# Altium PCB PCB2.PcbDoc
Units mm, origin at the board's own origin, x right, y up, seen from the top; angles counter-clockwise.
Board outline 41.66 x 60.2 mm, 2 copper layers (Top Layer, Bottom Layer); 34 components, 32 nets, 114 pads, 7 vias.
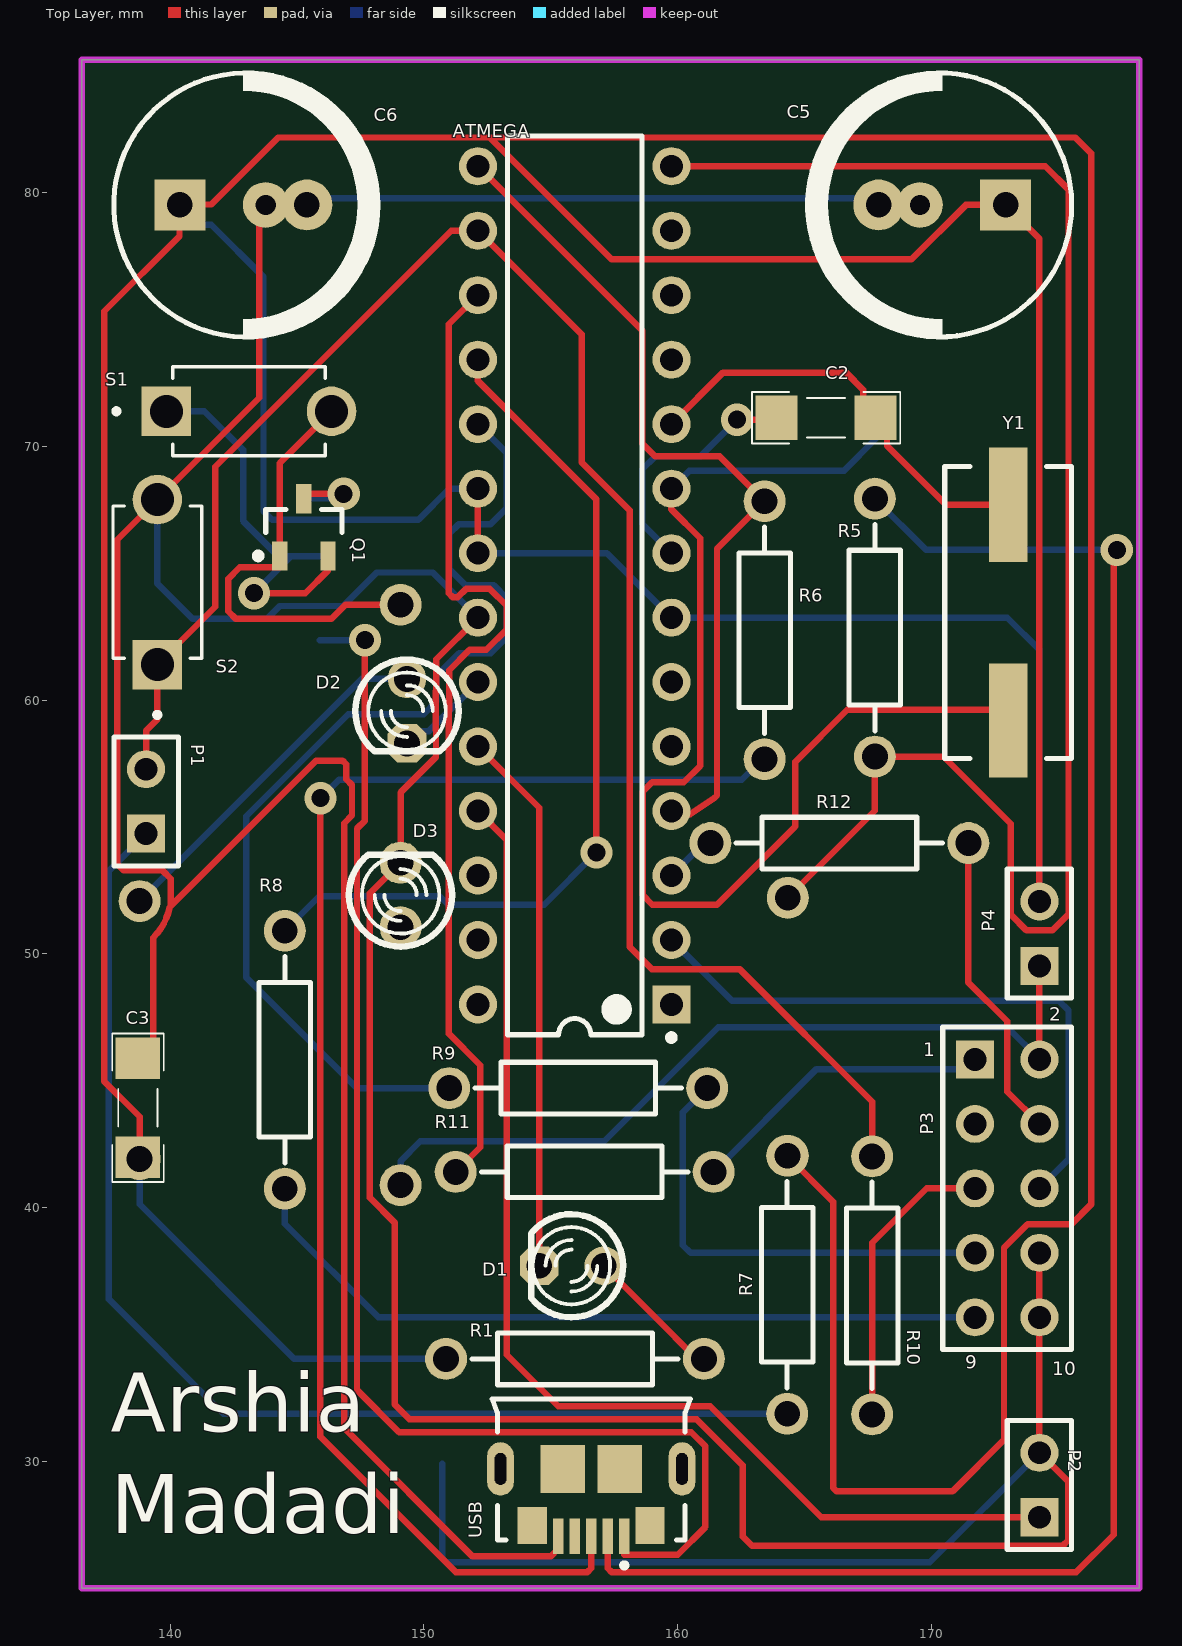
[diagram p0: Top Layer view]
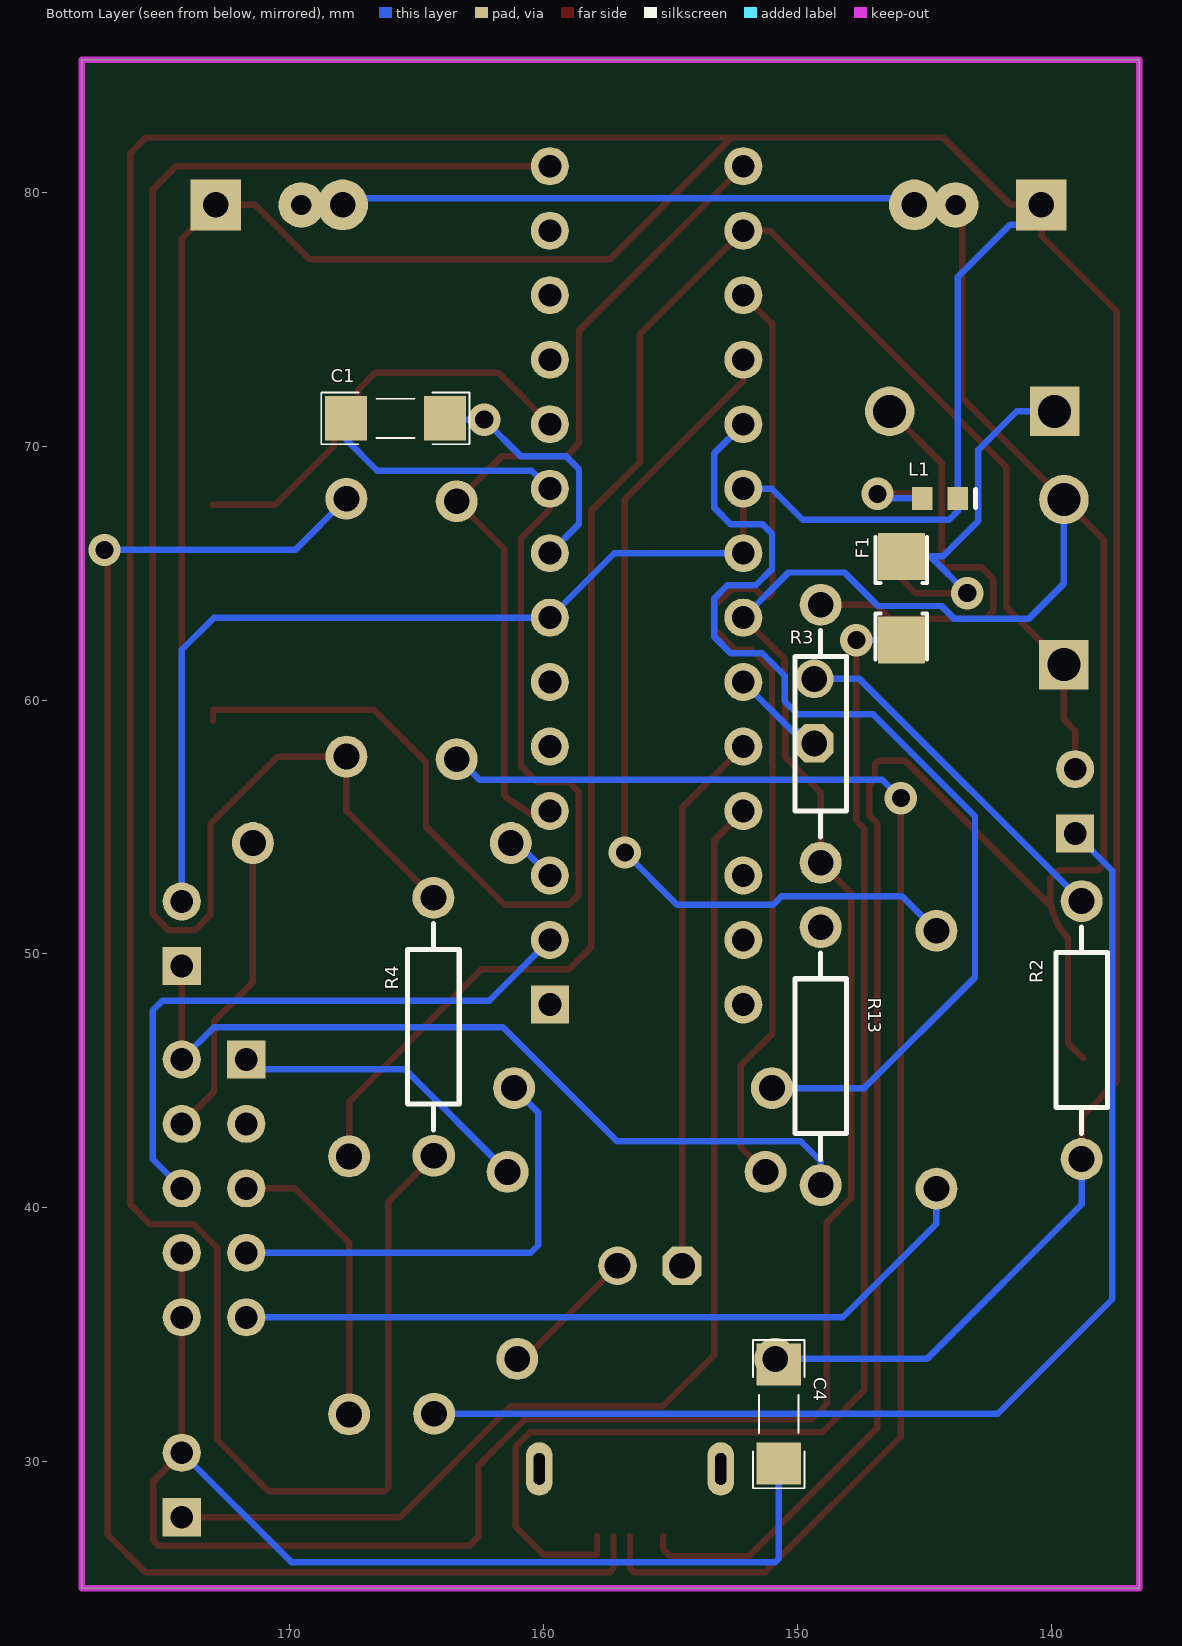
[diagram p1: Bottom Layer view, seen from below]
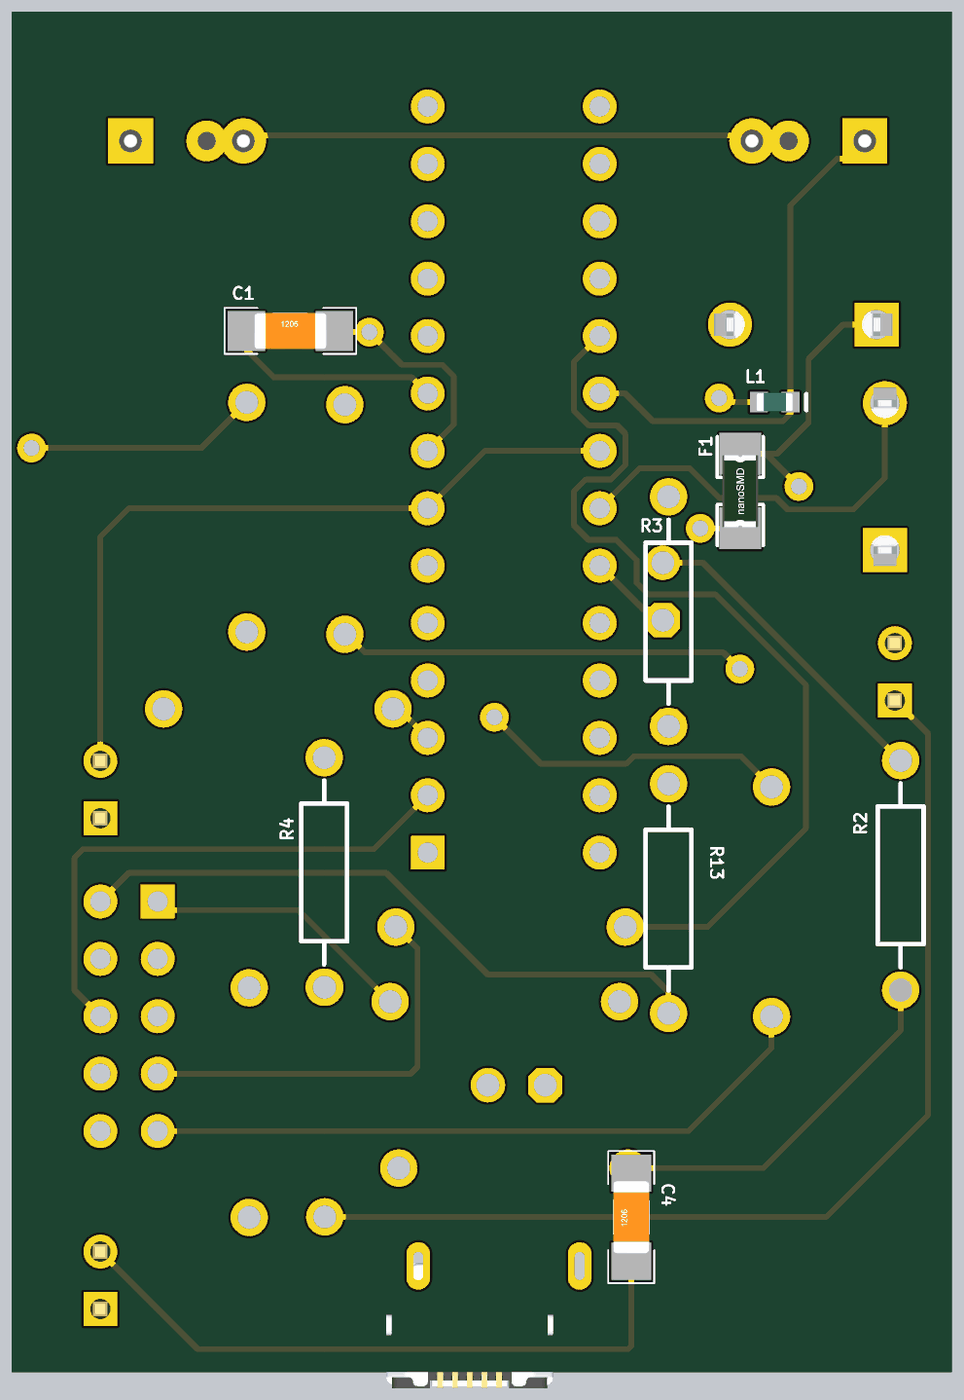
[diagram p2: 3D render of the assembled board from below, using the file's embedded part models]

## Layer stack, top to bottom
Top Solder: solder mask 0.0102, Solder Resist, Dk 3.5
Top Layer: signal copper 0.0356
Dielectric 1: dielectric 0.32, FR-4, Dk 4.8
Bottom Layer: signal copper 0.0356
Bottom Solder: solder mask 0.0102, Solder Resist, Dk 3.5

## Board outline
136.525,25.019 136.525,85.217 178.181,85.217 178.181,25.019

## Design rules (kind name [scope] priority, off if disabled: settings)
Clearance [All] p1: gap=0.254 ignorepadtopadclearanceinfootprint=FALSE except(0: Arc-Hole Track-Hole SMDPad-Hole THPad-Hole Via-Hole Fill-Hole Poly-Hole Region-Hole Text-Hole; 0.1: SMDPad-SMDPad)
PolygonConnect [All] p1: connectstyle=Relief reliefconductorwidth=0.254 reliefentries=4 polygonreliefangle="90 Angle" airgapwidth=0.254
RoutingVias [All] p1: holewidth=0.711 width=1.27 viastyle="Through Hole" minholewidth=0.711 minwidth=1.27 maxholewidth=0.711 maxwidth=1.27
SolderMaskExpansion [All] p1: expansion=0.102 istentingtop=FALSE
Width [All] p1: maxlimit=0.254 minlimit=0.254 preferedwidth=0.254
30 further rules are at their usual default settings.

## Components (designator, comment, footprint, x,y, rotation, side; value= is the part's Value field where it differs from the comment)
ATMEGA "ATmega8A-PU" 28P3 155.937,64.516 r180 top
C1 "22pF" CAPC4817X12N 165.827,71.093 r180 bottom
C2 "22pF" CAPC4817X12N 165.843,71.12 r180 top
C3 "100nF" CAPC4817X12N 138.736,43.942 r270 top
C4 "100nF" CAPC4817X12N 150.73,31.877 r90 bottom
C5 "10uF" "Cap electrolitic radial 10x20-5" 170.41,79.502 r180 top
C6 "10uF" "Cap electrolitic radial 10x20-5" 142.889,79.502 r0 top
D1 "LED" My_LED3MM 155.81,37.719 r180 top
D2 "LED" My_LED3MM 149.333,59.563 r270 top
D3 "LED" My_LED3MM 149.079,52.324 r90 top
F1 "F=1.0 A" "1206 FUSE" 145.904,64.008 r90 bottom
L1 "Inductor" INDC1608L 144.38,67.945 r0 bottom value=10uH
P1 "UPDATE" HDR1X2 139.055,54.737 r90 top
P2 "CLK" HDR1X2 174.244,27.813 r90 top
P3 "SW 1" HDR2X5 171.704,45.847 r270 top
P4 "VCC" HDR1X2 174.244,49.53 r90 top
Q1 "BC807" SOT23_BEC_N 145.269,66.802 r90 top
R1 "1k" My_axial-0.4 155.937,34.036 r180 top value=270
R2 "1k" My_axial-0.4 138.788,46.99 r270 bottom value=270
R3 "1k" My_axial-0.4 149.092,58.687 r90 bottom value=4k
R4 "1k" My_axial-0.4 164.319,47.117 r270 bottom value=2k
R5 "1k" My_axial-0.4 167.748,62.865 r90 top value=100
R6 "1k" My_axial-0.4 163.43,62.738 r270 top value=100
R7 "10k" My_axial-0.4 164.319,36.957 r270 top
R8 "1k" My_axial-0.4 144.507,45.847 r90 top value=270
R9 "1k" My_axial-0.4 156.064,44.704 r180 top value=270
R10 "1k" My_axial-0.4 167.64,36.957 r90 top value=270
R11 "1k" My_axial-0.4 156.318,41.402 r180 top value=270
R12 "1k" My_axial-0.4 166.351,54.356 r180 top value=270
R13 "1k" My_axial-0.4 149.066,45.961 r270 bottom value=270
S1 "Disconnect" SW_TL1107BF130WQ 143.11,71.374 r0 top
S2 "Reset Taget" SW_TL1107BF130WQ 139.499,64.643 r90 top
USB "USB3075-30-A" GCT_USB3075-30-A 157.89,27.068 r180 top
Y1 "12 MHz" "Crystal SMD" 173.014,63.441 r270 top

## Footprints (in the part's own frame and the unit in brackets; to place one, negate y for a bottom-side part, rotate by r counter-clockwise, add the part's x,y. Pads: shape width x height; smd on the part's side, far side on the other; paste and mask are expansions set on the pad)
28P3 [mm] "DIP, 28-Leads, Row Spacing 7.62mm, Pitch 2.54mm, Body 34.67x7.3mm"
  rect 1.5x1.5 hole 0.9: 1(-3.81,16.51)
  round 1.5 hole 0.9: 2(-3.81,13.97) 3(-3.81,11.43) 4(-3.81,8.89) 5(-3.81,6.35) 6(-3.81,3.81) 7(-3.81,1.27) 8(-3.81,-1.27) 9(-3.81,-3.81) 10(-3.81,-6.35) 11(-3.81,-8.89) 12(-3.81,-11.43) 13(-3.81,-13.97) 14(-3.81,-16.51) 15(3.81,-16.51) 16(3.81,-13.97) 17(3.81,-11.43) 18(3.81,-8.89) 19(3.81,-6.35) 20(3.81,-3.81) 21(3.81,-1.27) 22(3.81,1.27) 23(3.81,3.81) 24(3.81,6.35) 25(3.81,8.89) 26(3.81,11.43) 27(3.81,13.97) 28(3.81,16.51)
  silkscreen extent -3.94,-17.7 2.65,17.93, body extent -3.6,-17.65 3.6,17.65, height 4.58
"1206 FUSE" [mm] "Fast Acting Smd 1206 non-Resettable Fuse Chip For Pcb Board-Design:Abbas Basereh"
  rect 1.85x1.85 smd: 1(-1.65,0) 2(1.65,0)
  silkscreen extent -2.41,-1.02 2.41,1.02, body extent -1.6,-0.8 1.6,0.8, height 1
"Cap electrolitic radial 10x20-5" [mm] "Cap electrolitic radial 10x20-5-Design:Abbas Basereh"
  rect 2x2 hole 1: 1(-2.5,0)
  round 1.8 hole 0.8: 2(0.875,0)
  round 2 hole 1: 2(2.5,0)
  silkscreen extent -5.1,-5.2 5.3,5.2, body extent -5,-5 5,5, height 20
CAPC4817X12N [mm] "Chip Capacitor, 2-Leads, Body 4/80x1/70mm, IPC Medium Density-Design:Abbas Basereh"
  rect 1.65x1.75 smd: 1(-1.95,0) 2(1.95,0)
  silkscreen extent -2.92,-1.02 2.92,1.02, body extent -1.6,-0.8 1.6,0.8, height 1
"Crystal SMD" [mm] "DESIGNER ABBAS BASEREH"
  rect 4.5x1.5 smd: 1(-4.25,0) 2(4.25,0)
  silkscreen extent -5.75,-2.5 5.75,2.5, body extent -6.21,-2.25 6.09,2.25, height 5.18
GCT_USB3075-30-A [mm]
  rect 0.4x1.4 smd: 1(0,0) 2(0.65,0) 3(1.3,0) 4(1.95,0) 5(2.6,0)
  rect 1.15x1.45 smd paste+0: S1(-1.02,-0.42)
  rect 1.15x1.45 smd: S2(3.62,-0.42)
  rect 1.75x1.9 smd: S3(0.175,-2.65) S4(2.425,-2.65)
  oval 1.05x2.1 hole 0.45 slot 1.25 at 90 deg: S5(-2.275,-2.65) S6(4.875,-2.65)
  silkscreen extent -2.6,-5.4 5.2,1.25, body extent -3.9,-2.78 3.9,2.78, height 2.7
HDR1X2 [mm] "Connector; Header; 2 Position"
  rect 1.5x1.5 hole 0.9: 1(0,0)
  round 1.5 hole 0.9: 2(2.54,0)
  silkscreen extent -1.27,-1.27 3.81,1.27, body extent -1.27,-1.28 3.81,1.26, height 8.79
HDR2X5 [mm] "Connector; Header; 5x2 Position"
  rect 1.5x1.5 hole 0.9: 1(0,0)
  round 1.5 hole 0.9: 2(0,2.54) 3(2.54,0) 4(2.54,2.54) 5(5.08,0) 6(5.08,2.54) 7(7.62,0) 8(7.62,2.54) 9(10.16,0) 10(10.16,2.54)
  silkscreen extent -1.27,-1.27 11.43,3.81
INDC1608L [mm] "Chip Inductor, Body 1.6x0.8mm, IPC High Density"
  rect 0.8x0.9 smd: 1(-0.7,0) 2(0.7,0)
  silkscreen extent -1.4,-0.35 -1.4,0.35, body extent -0.8,-0.4 0.8,0.4, height 0.95
My_axial-0.4 [mil]
  round 65 hole 40: 1(-200.5,-0.5) 2(199.5,-0.5)
  silkscreen extent -160,-41 160,40
My_LED3MM [mil]
  round 60 hole 40: A(-50,0)
  oct 60x60 hole 40: K(50,0)
  silkscreen extent -80,-80 62,80
SOT23_BEC_N [mm] "SOT23, 3-Leads, Body 2.9x1.3mm, Pitch 0.95mm, Lead Span 2.4mm, IPC Medium Density"
  rect 1.15x0.6 smd: 1(-1.125,0.95) 2(-1.125,-0.95) 3(1.125,0)
  silkscreen extent -1.25,-1.5 0.7,1.92, body extent -1.23,-1.45 1.07,1.45, height 1
SW_TL1107BF130WQ [mm]
  rect 1.95x1.95 / inner round 1.95 / far side rect 1.95x1.95 hole 1.3: 1(-3.25,0)
  round 1.95 hole 1.3: 2(3.25,0)
  silkscreen extent -5.32,-1.75 3,1.75, body extent -3.95,-1.75 3.95,1.75, height 5

## Part data
ATMEGA: "8-bit AVR Microcontroller, 8KB Flash, 512 Bytes EEPROM, 1KB SRAM, 28-pin PDIP, Industrial Grade (-40°C to 85°C)", Supplier Part Number 1=ATMEGA8A-PU-ND, ComponentLink1Description="Manufacturer Link", ComponentLink1URL=http://www.atmel.com/products/avr/default.asp?, ComponentLink2Description="ATmega8A Datasheet", ComponentLink2URL=http://www.atmel.com/dyn/resources/prod_documents/doc8159.pdf, ComponentLink3Description="ATmega8A Summary", ComponentLink3URL=http://www.atmel.com/dyn/resources/prod_documents/8159S.pdf, ComponentLink4Description="Atmel.com Home", ComponentLink4URL=http://www.atmel.com, DatasheetVersion="revC, Jul-2009", PackageDescription="28-lead (0.300\"/7.62mm Wide) Plastic Dual Inline Package (PDIP)", PackageReference=28P3, PackageVersion="revB, Sep-2001", Published=1-Apr-2010, Publisher="Altium Limited", Supplier 1=Digi-Key, Supplier 2=Farnell, Supplier 3=Mouser, Supplier Part Number 2=1748534, Supplier Part Number 3=556-ATMEGA8A-PU
C1 C2 C3 C4: library part "CAP SMD 1206", "CAP 1206", Data=16-12-2016, Desc.="CAP SMD 1206", Designer="Abbas Basereh"
C5 C6: library part "Cap ELECTROLITIC TOTAL SIZE", "Cap electrolitic radial", Data=16-12-2016, Designer="Abbas Basereh"
D1 D2 D3: "Typical INFRARED GaAs LED", LatestRevisionDate=08-Jul-2005, LatestRevisionNote="Mech Layer 1 removed.", Published=8-Jun-2000, Publisher="Altium Limited"
F1: library part "Fuse SMD1206", "SMD Fuses 1206", Data=16-12-2016, Desc.="SMD Fuses 1206", Designer="Abbas Basereh"
P1 P2 P4: library part "Header 2", "Header, 2-Pin", LatestRevisionDate=17-Jul-2002, LatestRevisionNote="Re-released for DXP Platform.", Publisher="Altium Limited"
P3: library part "Header 5X2", "Header, 5-Pin, Dual row", LatestRevisionDate=17-Jul-2002, LatestRevisionNote="Re-released for DXP Platform.", Publisher="Altium Limited"
Q1: "PNP General-purpose Transistor", LatestRevisionDate=29-May-2009, LatestRevisionNote="IPC-7351 Footprint Added.", PackageDescription="3-Pin SOT-23 Package 0.95 mm Pitch, 2.4 mm Lead Span", PackageReference=SOT-23B, PackageVersion=Aug-1999, Published=8-Jun-2000, Publisher="Altium Limited"
R1 R2 R3 R4 R5 R6 R7 R8 R9 R10 R11 R12 R13: library part Res, "resistor 1/4 wat"
S1 S2: library part TL1107BF130WQ, "SWITCH TACTILE SPST-NO 0.05A 12V", Package=None, Availability="In Stock", Check_prices=https://www.snapeda.com/parts/TL1107BF130WQ/E-Switch/view-part/?ref=eda, MF=E-Switch, MP=TL1107BF130WQ, Price=None, Purchase-URL=https://pricing.snapeda.com/search/part/TL1107BF130WQ/?ref=eda, SnapEDA_Link=https://www.snapeda.com/parts/TL1107BF130WQ/E-Switch/view-part/?ref=snap
USB: "USB - micro B USB 2.0 Receptacle Connector 5 Position Surface Mount, Right Angle; Through Hole, 2.35mm profile, 5 Pins, Horizontal, Bottom mount", Package=None, Availability="In Stock", Check_prices=https://www.snapeda.com/parts/USB3075-30-A/Global+Connector+Technology/view-part/?ref=eda, MF="Global Connector Technology", MP=USB3075-30-A, Price=None, SnapEDA_Link=https://www.snapeda.com/parts/USB3075-30-A/Global+Connector+Technology/view-part/?ref=snap
Y1: library part XTAL, "XTAL Crystal", ComponentLink1Description=Datasheet, ComponentLink2Description=Reference, Design Date=2017-1-3, Designer="ABBAS BASEREH", Mounting Technology="Surface Mount\Through-Hole", Status=Unreleased
L1: Code_IEC=1005, Code_JEITA=0402, LatestRevisionDate=29-May-2009, LatestRevisionNote="IPC-7351 Footprint Added.", PackageDescription="Chip Inductor", PackageReference=0402-A, Published=8-Jun-2000, Publisher="Altium Limited"

## Via types
v1: diameter 1.27, hole 0.711, Top Layer to Bottom Layer, 7 vias

## Nets (pads, with @x,y where several pads share a name; then routed paths per layer and width w, separated by ;. In a path a pad name is that pad's centre, name@x,y a point inside that pad or via, vN(x,y) a via of type N, cw(c..) or ccw(c..) an arc to the next point about the centre after c; other vN are vias at no path point)
+5: ATMEGA.7 ATMEGA.20 ATMEGA.21 C3.2 C4.2 C5.1 C6.1 L1.1 P4.2 R1.2 R2.2 R4.2 R7.1 | length 278
  Top Layer w0.254: R2.2@138.736,41.975 C3.2 ; R2.2@138.795,41.916 138.801,41.91 R2.2 138.801,43.588 137.414,44.975 137.414,75.311 140.373,78.27 140.373,79.486 140.405,79.518 141.621,79.518 144.26,82.157 152.595,82.157 ; ATMEGA.21 ATMEGA.20 ; R7.1 166.116,40.24 166.116,28.978 166.265,28.829 170.815,28.829 172.847,30.861 172.847,38.429 173.776,39.358 175.502,39.358 176.276,40.132 176.276,81.534 175.653,82.157 152.595,82.157 ; P4.2 174.244,78.168 C5.1 171.347,79.502 169.2,77.355 157.397,77.355 152.595,82.157
  Bottom Layer w0.254: R2.2 138.801,40.142 144.894,34.049 R1.2 150.87,33.998 150.73,33.858 C4.2 ; C6.1 141.167,78.724 141.621,78.724 143.68,76.665 L1.1 143.68,67.445 144.018,67.107 149.783,67.107 151.002,68.326 ATMEGA.20 ; ATMEGA.21 157.207,65.786 ATMEGA.7 172.974,63.246 174.244,61.976 P4.2
GND: ATMEGA.22 C3.1 C4.1 C5.2 C6.2 D3.K P2.2 P3.8 P3.10 R3.1 S2.2 USB.5 | length 233.7
  Top Layer w0.254: C3.1 139.338,46.494 139.338,50.64 ccw(c137.669,52.309) 139.984,51.846 140.03,51.892 ; C6.2@143.764,79.502 143.51,79.248 143.51,71.904 S2.2 137.922,66.316 137.922,53.543 138.176,53.289 139.7,53.289 140.03,52.959 140.03,51.892 ; ATMEGA.22 150.488,61.607 150.488,60.372 150.47,60.353 150.47,58.838 150.476,58.832 150.476,57.754 149.079,56.357 D3.K 147.873,52.387 147.873,40.394 148.844,39.423 148.844,32.258 149.428,31.674 160.738,31.674 162.56,29.852 162.56,27.051 162.929,26.682 175.152,26.682 175.375,26.905 175.375,29.222 P2.2 P3.10 P3.8 ; USB.5 155.29,26.568 154.991,26.269 151.912,26.269 146.857,31.324 146.857,55.148 147.168,55.459 147.168,56.656 146.939,56.885 146.939,57.469 146.79,57.618 145.756,57.618 140.03,51.892
  Bottom Layer w0.254: S2.2 139.499,64.59 140.894,63.195 143.809,63.195 144.319,63.705 146.819,63.705 148.138,65.024 150.349,65.024 ATMEGA.22 ; C6.2@143.764,79.502 145.389,79.502 145.643,79.756 167.656,79.756 167.91,79.502 C5.2@169.535,79.502 ; C4.1 150.73,26.184 150.879,26.035 169.926,26.035 P2.2
NetATMEGA_2: ATMEGA.2 P3.6 | length 24.3
  Bottom Layer w0.254: ATMEGA.2 162.135,48.158 175.006,48.158 175.387,47.777 175.387,41.91 P3.6
NetATMEGA_3: ATMEGA.3 R12.2 | length 2.1
  Bottom Layer w0.254: ATMEGA.3 161.03,54.369 R12.2
NetATMEGA_4: ATMEGA.4 ATMEGA.15 R6.1 | length 33.8
  Top Layer w0.254: ATMEGA.15 158.598,74.555 158.598,70.104 159.106,69.596 161.652,69.596 R6.1 161.544,65.957 161.544,56.25 161.47,56.175 161.452,56.158 160.484,55.503 160.382,55.503 ATMEGA.4
NetATMEGA_8: ATMEGA.8 C1.2 C2.2 | length 11.6
  Top Layer w0.254: v1(162.331,71.044) 163.893,71.044 C2.2
  Bottom Layer w0.254: ATMEGA.8 158.598,66.935 158.598,69.088 159.106,69.596 160.884,69.596 v1(162.331,71.044) 163.877,71.044 C1.2
NetATMEGA_9: ATMEGA.9 C1.1 Y1.2 | length 47.5
  Top Layer w0.254: ATMEGA.9 159.747,67.507 160.884,66.37 160.884,57.404 160.237,56.757 158.985,56.757 158.616,56.388 158.616,52.324 158.997,51.943 161.544,51.943 164.624,55.023 164.624,57.563 166.675,59.614 173.014,59.614 Y1.2
  Bottom Layer w0.254: ATMEGA.9 160.458,69.037 166.548,69.037 167.777,70.267 C1.1
NetATMEGA_10: ATMEGA.10 C2.1 Y1.1 | length 17
  Top Layer w0.254: ATMEGA.10 161.779,72.898 166.624,72.898 167.295,72.227 167.295,71.618 168.239,70.674 168.239,70.013 170.561,67.691 Y1.1
NetATMEGA_14: ATMEGA.14 R4.1 R5.1 | length 64.4
  Top Layer w0.254: ATMEGA.14 174.473,81.026 175.387,80.112 175.387,51.562 174.752,50.927 173.736,50.927 173.113,51.55 173.113,55.131 170.472,57.772 R5.1 167.761,55.639 R4.1
NetATMEGA_16: ATMEGA.16 P1.2 R10.2 S2.1 | length 72.2
  Top Layer w0.254: P1.2 139.055,58.791 139.499,59.235 S2.1 141.779,63.673 141.779,69.186 151.079,78.486 ATMEGA.16 156.21,74.403 156.21,69.367 158.108,67.469 158.108,50.274 158.979,49.403 162.433,49.403 167.653,44.183 R10.2
NetATMEGA_17: ATMEGA.17 R11.2 | length 39.5
  Top Layer w0.254: R11.2 152.222,42.386 152.222,45.618 150.978,46.863 150.978,57.537 150.984,57.544 150.984,59.042 150.978,59.049 150.978,59.581 150.996,59.6 150.996,61.174 151.798,61.976 152.456,61.976 153.258,62.778 153.258,63.714 152.595,64.377 151.659,64.377 151.337,64.055 151.126,64.055 150.978,64.204 150.978,74.797 ATMEGA.17
NetATMEGA_18: ATMEGA.18 R8.2 | length 35.2
  Top Layer w0.254: ATMEGA.18 152.127,72.568 156.794,67.901 v1(156.794,54)
  Bottom Layer w0.254: R8.2 145.879,52.273 150.622,52.273 150.952,51.943 154.737,51.943 v1(156.794,54)
NetATMEGA_19: ATMEGA.19 R9.2 | length 42
  Bottom Layer w0.254: R9.2 147.358,44.717 143.002,49.073 143.002,55.423 147.015,59.436 149.987,59.436 150.495,59.944 150.495,60.96 151.384,61.849 152.629,61.849 153.264,62.484 153.264,64.008 152.756,64.516 151.638,64.516 150.996,65.158 150.996,66.548 151.365,66.917 152.617,66.917 153.264,67.564 153.264,69.729 ATMEGA.19
NetATMEGA_23: ATMEGA.23 D2.K | length 3.8
  Bottom Layer w0.254: D2.K 149.82,58.78 150.201,58.78 ATMEGA.23
NetATMEGA_24: ATMEGA.24 D1.K | length 21.4
  Top Layer w0.254: ATMEGA.24 154.54,55.753 D1.K
NetATMEGA_25: ATMEGA.25 P2.1 | length 45.5
  Top Layer w0.254: ATMEGA.25 153.264,54.489 153.264,34.214 155.296,32.182 161.283,32.182 165.651,27.813 P2.1
NetD1_A: D1.A R1.1 | length 5.5
  Top Layer w0.254: D1.A 159.01,35.789 160.75,34.049 R1.1
NetD2_A: D2.A R2.1 | length 14.2
  Bottom Layer w0.254: R2.1 147.551,60.833 D2.A
NetD3_A: D3.A R13.1
NetF1_1: F1.1 USB.1 | length 53.6
  Top Layer w0.254: v1(147.676,62.358) 147.676,55.249 147.365,54.938 147.365,32.823 149.022,31.166 160.528,31.166 161.087,30.607 161.087,27.432 159.995,26.34 157.89,26.34 USB.1
  Bottom Layer w0.254: F1.1 v1(147.676,62.358)
NetF1_2: F1.2 Q1.2 S1.1 | length 16
  Top Layer w0.254: v1(143.307,64.211) 145.33,64.211 146.219,65.1 Q1.2
  Bottom Layer w0.254: S1.1 141.351,71.374 142.875,69.85 142.875,67.055 144.272,65.658 144.754,65.658 ; v1(143.307,64.211) 144.754,65.658 ; F1.2 144.754,65.658
NetL1_2: L1.2 Q1.3 | length 3.6
  Top Layer w0.254: Q1.3 145.269,68.123 v1(146.837,68.123)
  Bottom Layer w0.254: L1.2 146.66,67.945 v1(146.837,68.123)
NetP1_1: P1.1 R7.2 | length 47.5
  Bottom Layer w0.254: P1.1 137.592,53.274 137.592,36.398 142.1,31.89 R7.2
NetP3_1: P3.1 R11.1 | length 12.1
  Bottom Layer w0.254: R11.1 165.462,45.466 171.323,45.466 P3.1
NetP3_2: P3.2 P4.1 R13.2 | length 32.5
  Top Layer w0.254: P3.2 P4.1
  Bottom Layer w0.254: R13.2 149.079,41.84 149.86,42.621 157.099,42.621 161.595,47.117 172.974,47.117 P3.2
NetP3_4: P3.4 R12.1 | length 12.2
  Top Layer w0.254: R12.1 171.444,48.876 172.974,47.346 172.974,44.577 P3.4
NetP3_5: P3.5 R10.1 | length 11.7
  Top Layer w0.254: R10.1 167.653,38.621 169.799,40.767 P3.5
NetP3_7: P3.7 R9.1 | length 18.2
  Bottom Layer w0.254: R9.1 160.198,43.758 160.198,38.532 160.503,38.227 P3.7
NetP3_9: P3.9 R8.1 | length 30.1
  Bottom Layer w0.254: R8.1 144.52,39.376 148.209,35.687 P3.9
NetQ1_1: Q1.1 R3.2 S1.2 | length 17.6
  Top Layer w0.254: S1.2 144.319,69.333 Q1.1 144.319,65.229 142.748,65.229 142.291,64.772 142.291,63.5 142.596,63.195 146.351,63.195 146.91,63.754 R3.2
NetR5_2: R5.2 USB.2 | length 71.1
  Top Layer w0.254: USB.2 157.24,25.803 157.389,25.654 175.692,25.654 177.165,27.127 177.165,65.786 v1(177.292,65.913)
  Bottom Layer w0.254: R5.2 169.78,65.913 v1(177.292,65.913)
NetR6_2: R6.2 USB.3 | length 57.5
  Top Layer w0.254: v1(145.923,56.134) 145.923,30.988 151.257,25.654 156.441,25.654 156.59,25.803 USB.3
  Bottom Layer w0.254: v1(145.923,56.134) 146.655,56.866 162.516,56.866 163.321,57.671 R6.2
pads on no net: ATMEGA.1 ATMEGA.5 ATMEGA.6 ATMEGA.11 ATMEGA.12 ATMEGA.13 ATMEGA.26 ATMEGA.27 ATMEGA.28 P3.3 USB.4 USB.S1 USB.S2 USB.S3 USB.S4 USB.S5 USB.S6

## Keep-outs
Keep-Out Layer:
  the board outline again, w0.254

## Silkscreen, mask and mechanical layers (free items; w line width, h text height)
Top Overlay:
  text "Arshia / Madadi" at 137.668,26.416 h4

## Text inside footprints (layer, text, board x,y; h text height)
P3: Top Overlay "2" at 174.625,47.371 h0.53; Top Overlay "1" at 169.672,45.974 h0.53; Top Overlay "9" at 171.323,33.655 h0.53; Top Overlay "10" at 174.752,33.401 h0.53
USB: Mechanical 13 "PCB EDGE" at 152.174,31.123 h0.41 r180